# Altium PCB PCB_PokeBot.PcbDoc
Units mm, origin at the board's own origin, x right, y up, seen from the top; angles counter-clockwise.
Board outline 104 x 104 mm, 2 copper layers (Top Layer, Bottom Layer); 13 components, 10 nets, 63 pads, 0 vias.
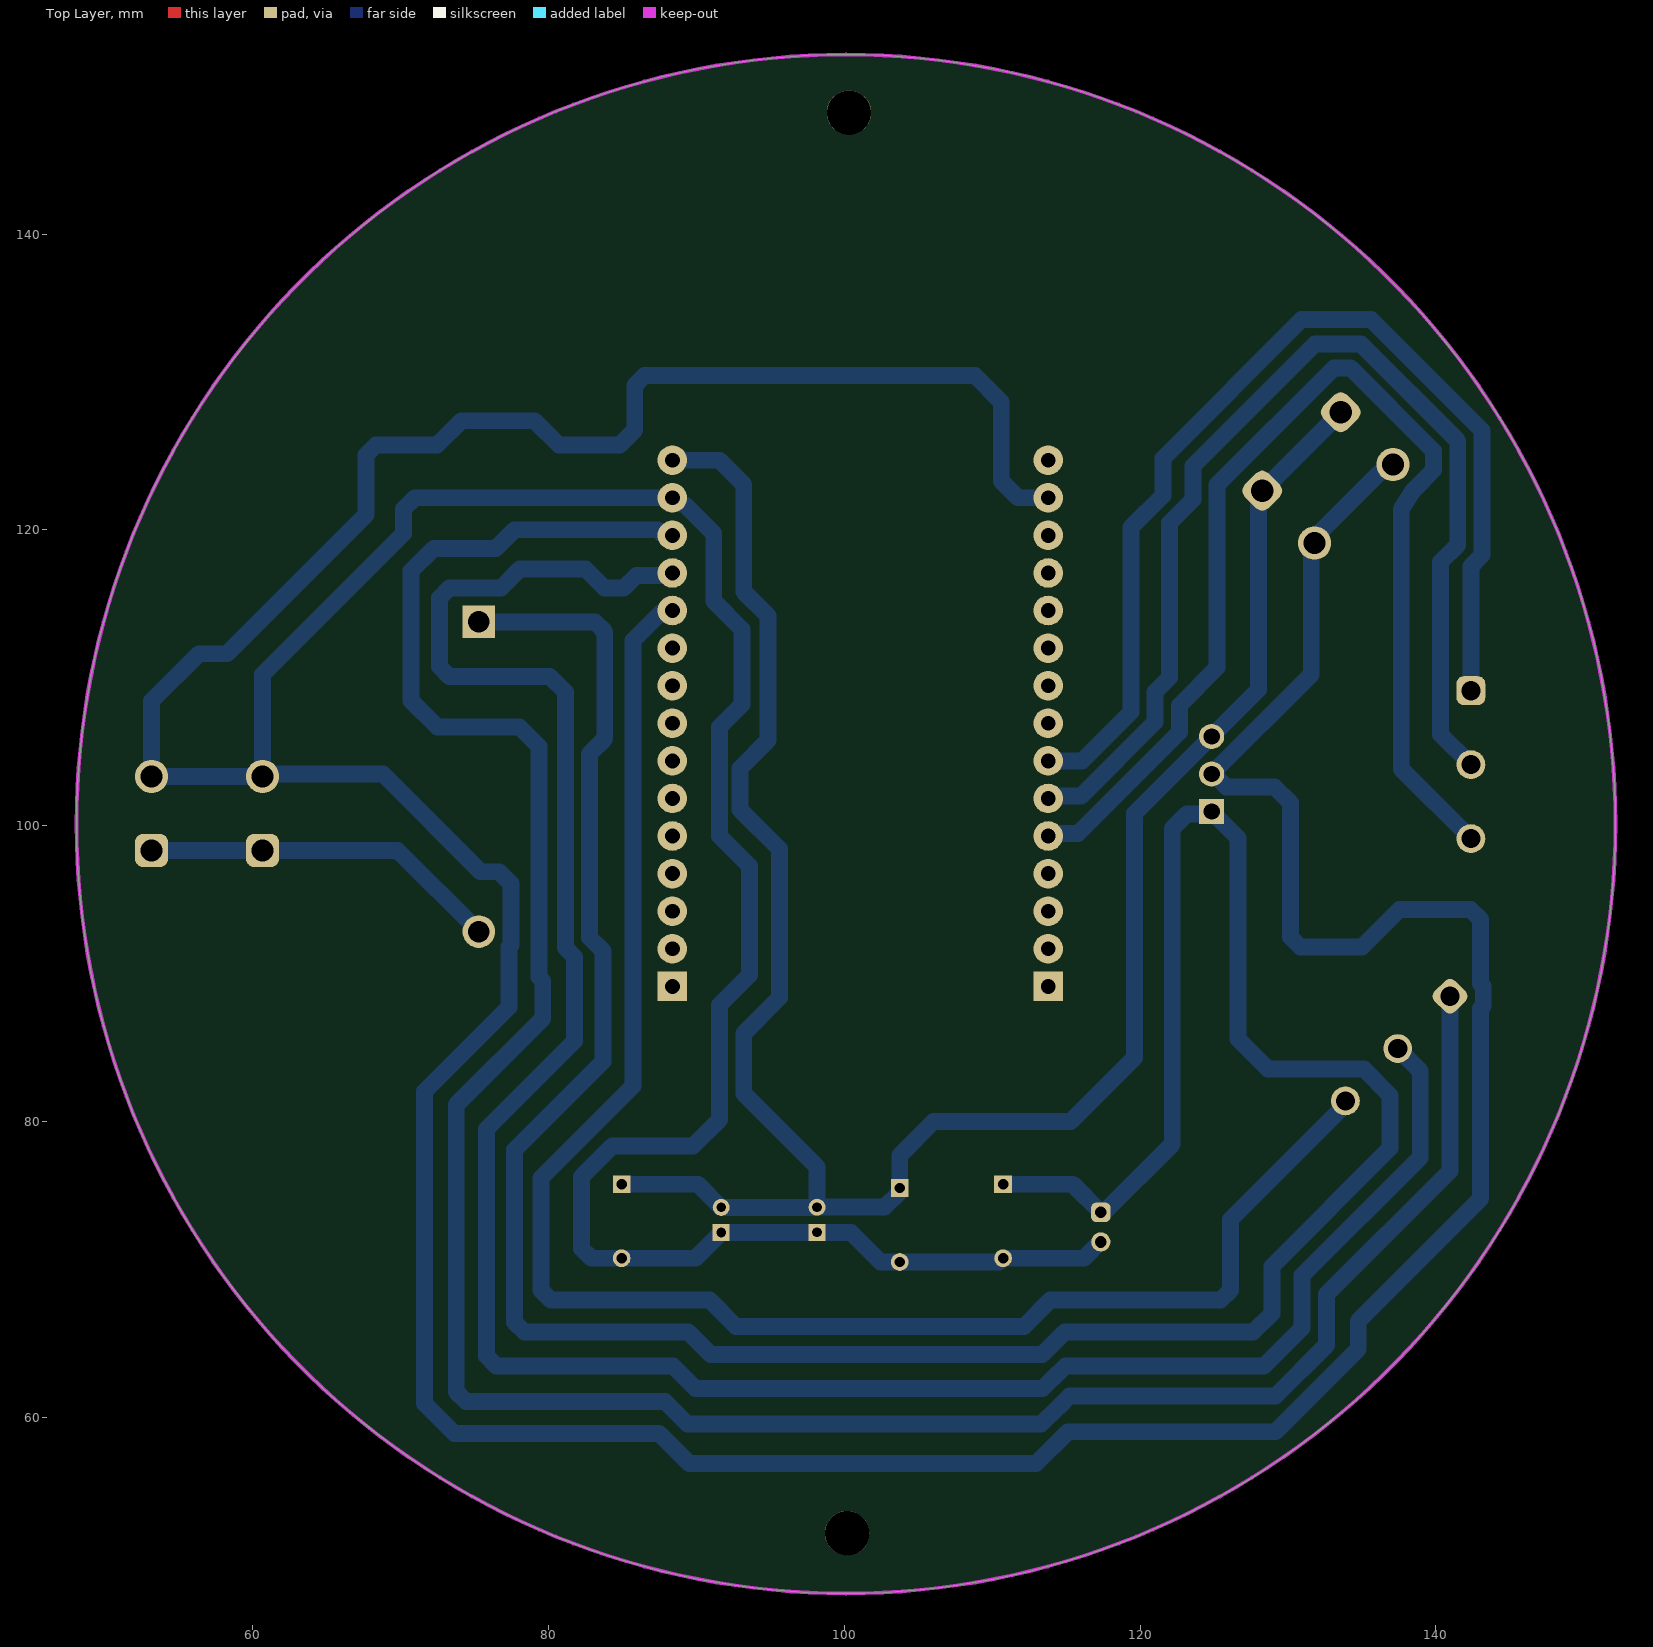
[diagram p0: Top Layer view]
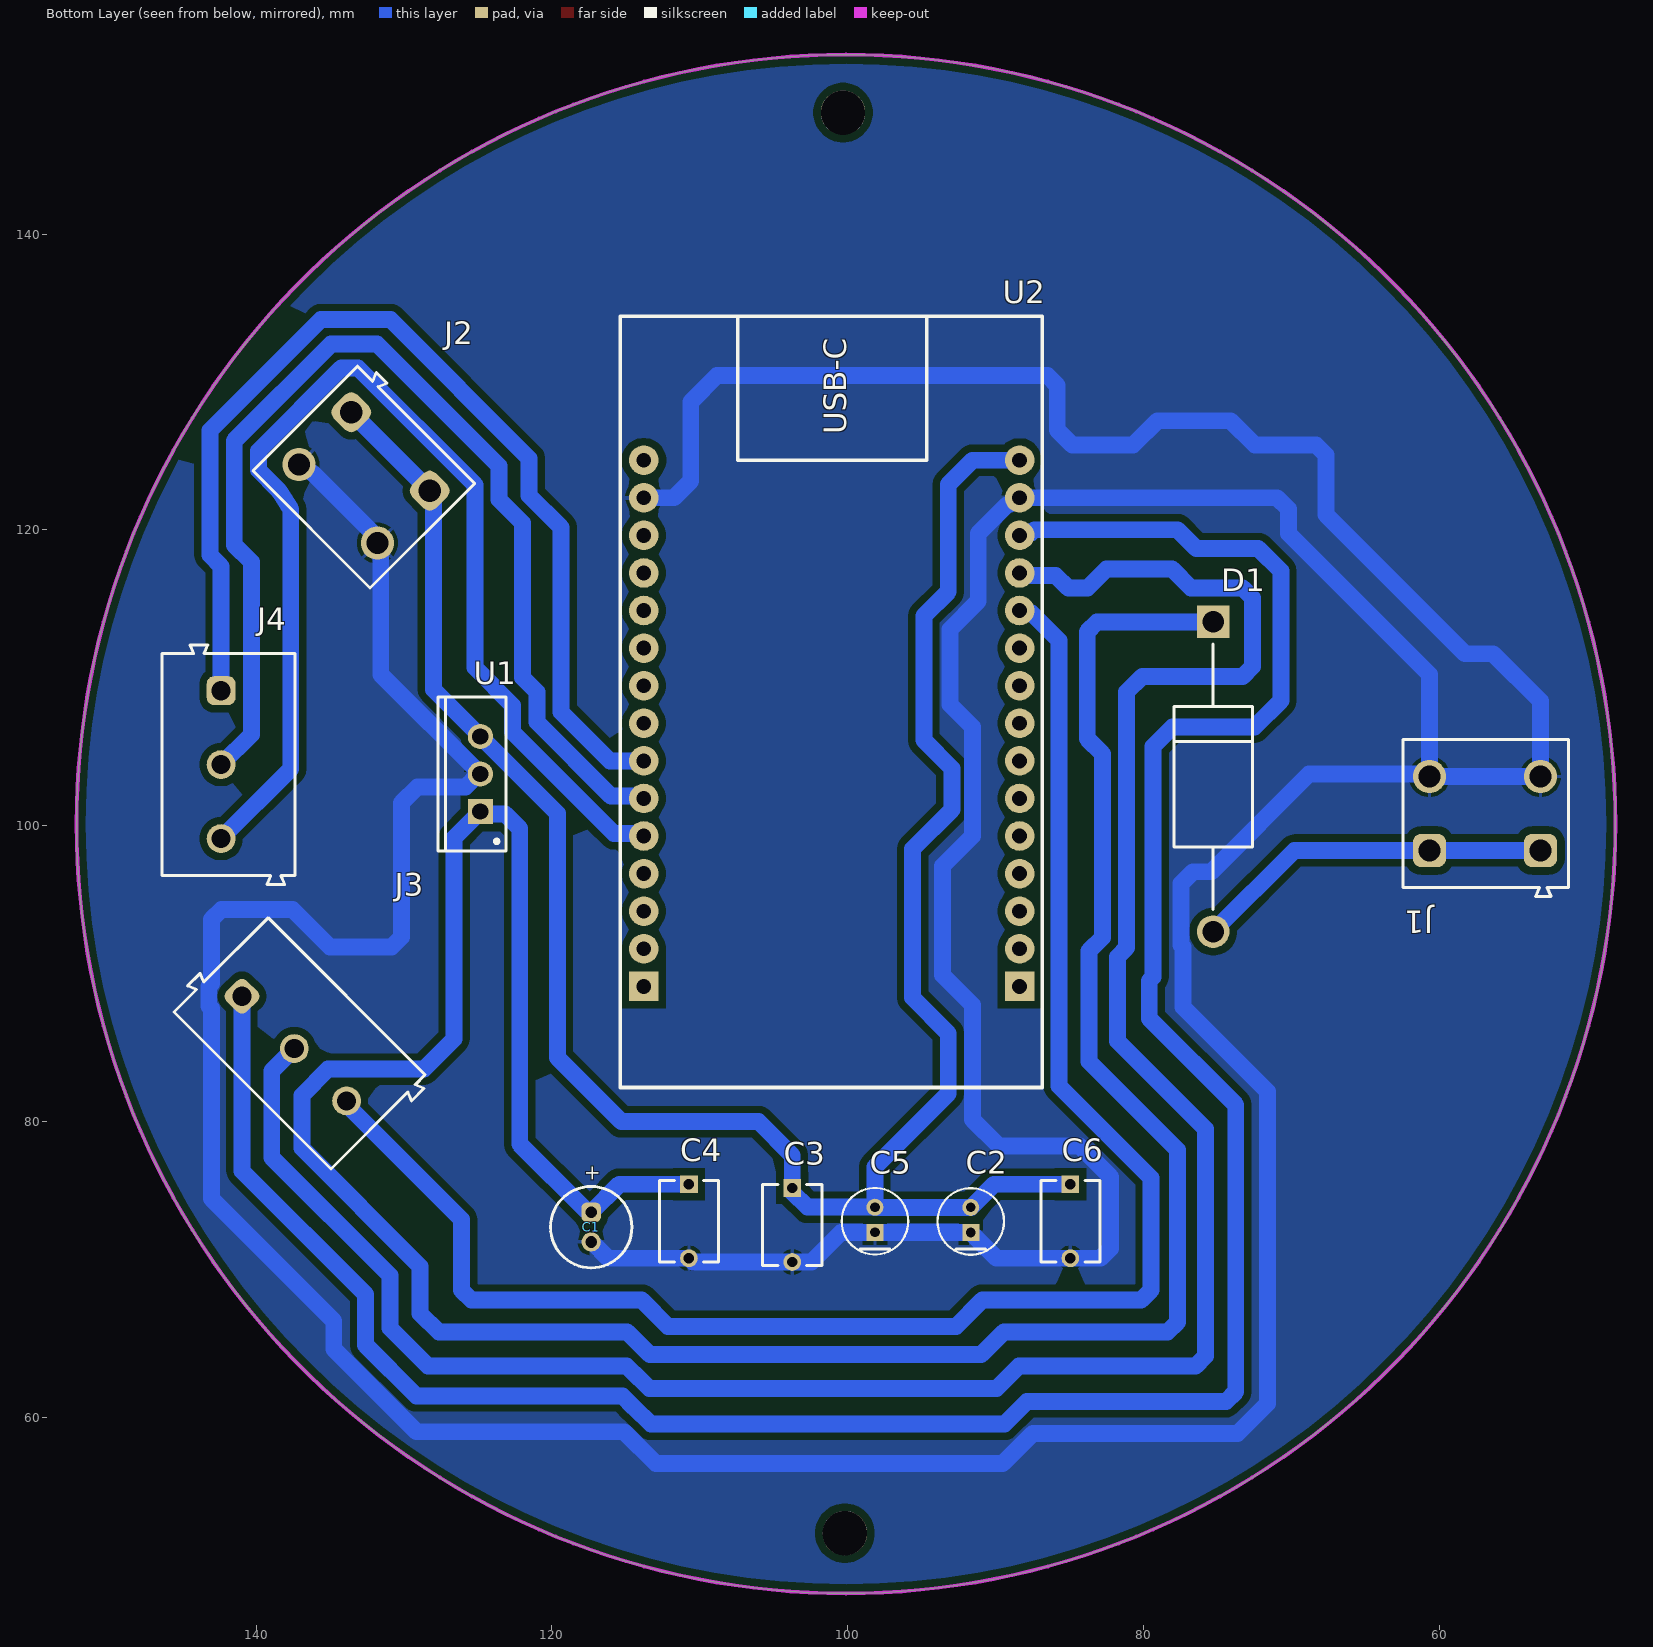
[diagram p1: Bottom Layer view, seen from below]
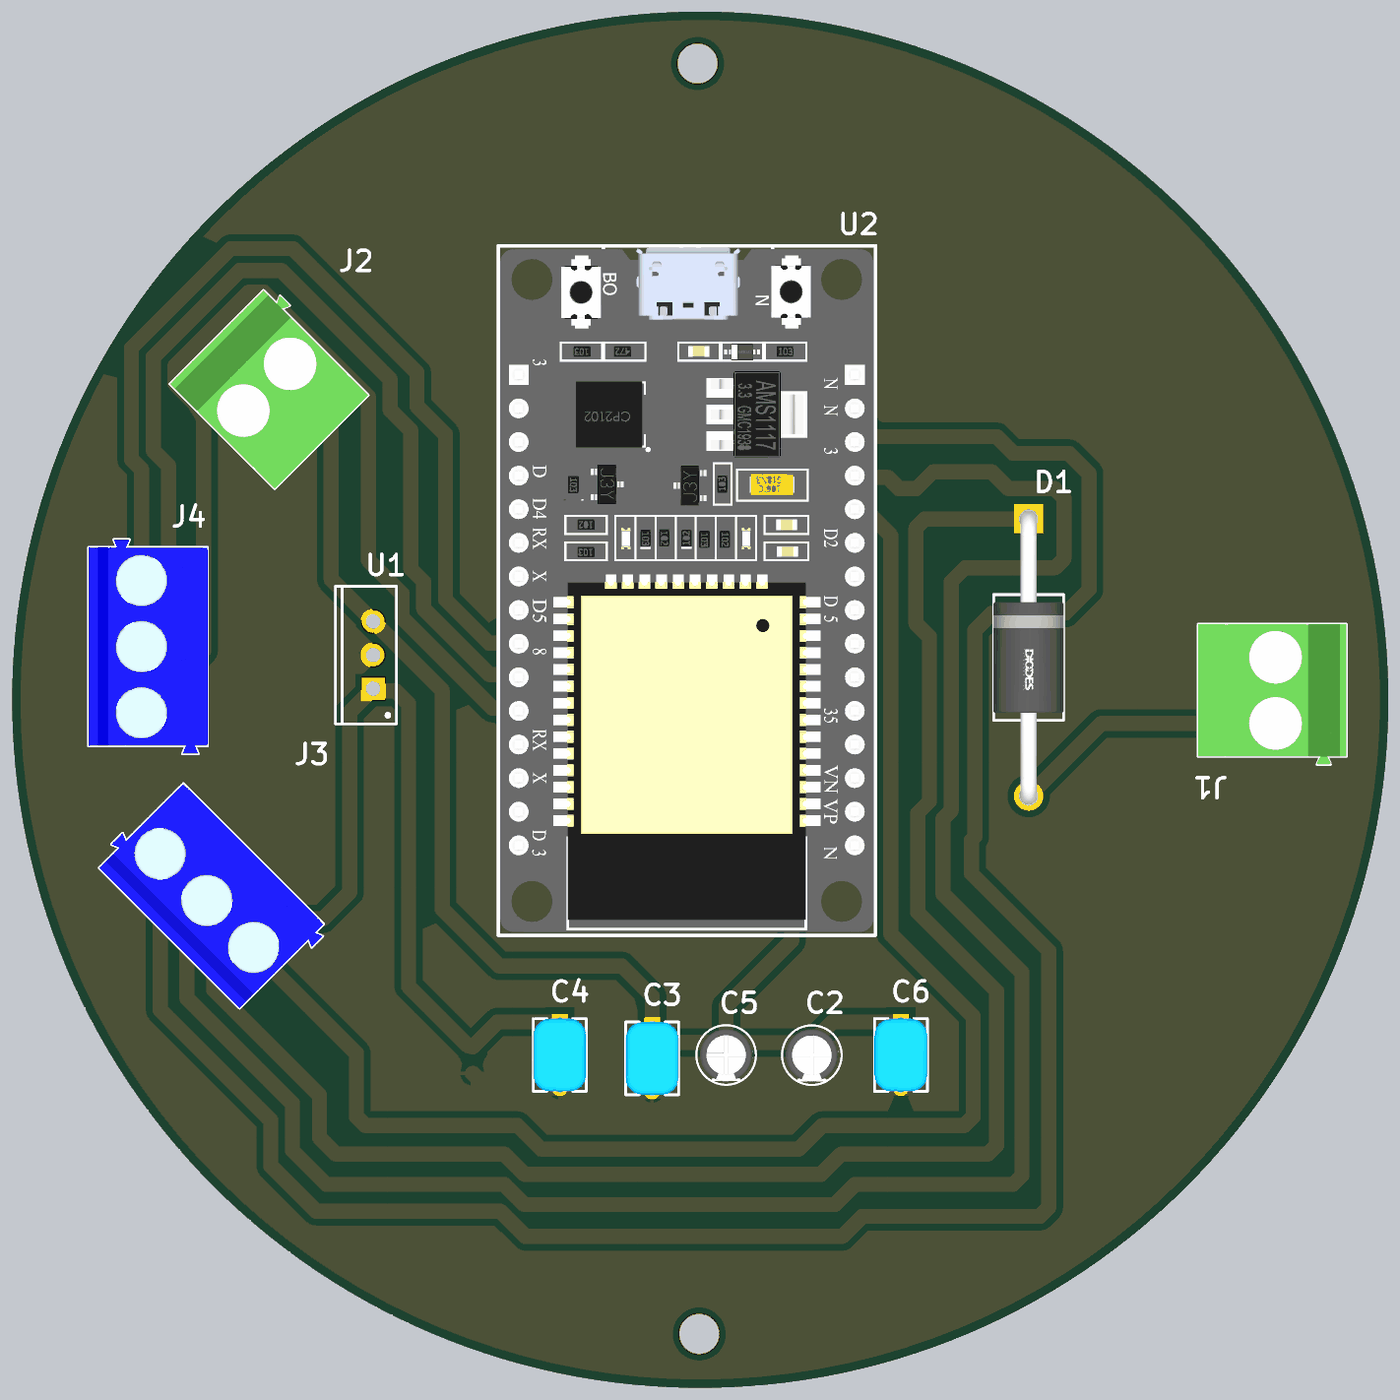
[diagram p2: 3D render of the assembled board from below, using the file's embedded part models]

## Layer stack, top to bottom
Top Solder: solder mask 0.0102, Solder Resist, Dk 3.5
Top Layer: signal copper 0.0356
Dielectric 1: dielectric 0.32, FR-4, Dk 4.8
Bottom Layer: signal copper 0.0356
Bottom Solder: solder mask 0.0102, Solder Resist, Dk 3.5

## Board outline
100.127,48.127 cw(c100.127,100.127) 48.127,100.127 cw(c100.127,100.127) 100.127,152.127 cw(c100.127,100.127) 152.127,100.127 cw(c100.127,100.127)

## Design rules (kind name [scope] priority, off if disabled: settings)
Clearance [All] p1: gap=0.5 ignorepadtopadclearanceinfootprint=FALSE
PolygonConnect [All] p1: connectstyle=Relief reliefconductorwidth=0.254 reliefentries=4 polygonreliefangle="90 Angle" airgapwidth=0.254
RoutingVias [All] p1: holewidth=0.711 width=1.27 viastyle="Through Hole" minholewidth=0.711 minwidth=1.27 maxholewidth=0.711 maxwidth=1.27
SolderMaskExpansion [All] p1: expansion=0.102 istentingtop=FALSE
SupplyNets "Schematic Supply Nets_2" [InNet('5V')] p1: voltage=0.000
SupplyNets "Schematic Supply Nets_1" [InNet('VMOT')] p2: voltage=0.000
SupplyNets "Schematic Supply Nets" [InNet('GND')] p3: voltage=0.000
Width [All] p1: maxlimit=1.27 minlimit=1.016 preferedwidth=1.143
30 further rules are at their usual default settings.

## Components (designator, comment, footprint, x,y, rotation, side; value= is the part's Value field where it differs from the comment)
C1 "860020672002" WCAP-ATG5_D5H11 1387.348,1342.882 r90 bottom
C2 "EEAGA1E100E" FP-RAD-TH-D_4_0_5-L_7_1-F-MFG 91.694,73.267 r90 bottom
C3 "RDED72W104K3K1H03B" FP-RDE3M1-MFG 103.759,73.025 r270 bottom
C4 "RDED72W104K3K1H03B" FP-RDE3M1-MFG 110.744,73.279 r270 bottom
C5 "EEAGA1E100E" FP-RAD-TH-D_4_0_5-L_7_1-F-MFG 98.171,73.279 r90 bottom
C6 "RDED72W104K3K1H03B" FP-RDE3M1-MFG 84.963,73.279 r270 bottom
D1 "1N5408G-T" FP-DO-201AD-MFG 75.311,103.322 r270 bottom value="110 pF"
J1 "691254710002" 691254710002 56.896,100.838 r90 bottom
J2 "691254710002" 691254710002 132.715,123.571 r315 bottom
J3 "691101710003" 691101710003 137.06,85.304 r225 bottom
J4 "691101710003" 691101710003 141.859,104.14 r270 bottom
U1 "L7805ABV" TO220 124.841,103.505 r90 bottom
U2 "ESP32" ESP32_DevKitCWROOM32 88.473,89.124 r90 bottom

## Footprints (in the part's own frame and the unit in brackets; to place one, negate y for a bottom-side part, rotate by r counter-clockwise, add the part's x,y. Pads: shape width x height; smd on the part's side, far side on the other; paste and mask are expansions set on the pad)
691101710003 [mm] "5,00mm - modular - blue - Horizontal entry with pressure clamp - 12,6mm height - 03p"
  rrect50% 1.95x1.95 hole 1.3: 1(-5,-0.5)
  round 1.95 hole 1.3: 2(0,-0.5) 3(5,-0.5)
  silkscreen extent -8.1,-4.5 8.1,4.5, body extent -8.1,-4.5 8.1,4.5, height 12.65
691254710002 [mm] "Serie 2547-5.00mm Horizontal Cable Entry with Rising Cage Clamp, 2 pins"
  rrect50% 2.25x2.25 hole 1.5: 1(-2.5,-3.7) 1(-2.5,3.8)
  round 2.25 hole 1.5: 2(2.5,-3.7) 2(2.5,3.8)
  silkscreen extent -5.6,-5.6 5,5.6, body extent -5.6,-5.6 5,5.6, height 18.05
ESP32_DevKitCWROOM32 [mm] "Multiprotocol Modules SMD Module ESP32-WROOM-32E, ESP32-D0WD-V3, 16 MB SPI flash, PCB antenna"
  rect 2x2 hole 1: 1(0.03,-0.081) 30(0.03,25.319)
  round 2 hole 1: 2(2.57,-0.081) 3(5.11,-0.081) 4(7.65,-0.081) 5(10.19,-0.081) 6(12.73,-0.081) 7(15.27,-0.081) 8(17.81,-0.081) 9(20.35,-0.081) 10(22.89,-0.081) 11(25.43,-0.081) 12(27.97,-0.081) 13(30.51,-0.081) 14(33.05,-0.081) 15(35.59,-0.081) 16(35.59,25.319) 17(33.05,25.319) 18(30.51,25.319) 19(27.97,25.319) 20(25.43,25.319) 21(22.89,25.319) 22(20.35,25.319) 23(17.81,25.319) 24(15.27,25.319) 25(12.73,25.319) 26(10.19,25.319) 27(7.65,25.319) 28(5.11,25.319) 29(2.57,25.319)
  silkscreen extent -6.8,-1.61 45.32,26.92, body extent -6.54,-1.43 45.16,26.77, height 7.79
FP-DO-201AD-MFG [mm]
  rect 2.2x2.2 hole 1.45 paste-2539.97 mask+0: 1(-10.47,0)
  round 2.2 hole 1.45 paste-2539.97 mask+0: 2(10.47,0)
  silkscreen extent -8.97,-2.65 8.97,2.65, body extent -11.09,-2.65 11.09,2.65, height 5.3
FP-RAD-TH-D_4_0_5-L_7_1-F-MFG [mm]
  rect 1.15x1.15 hole 0.65 paste-2539.97 mask+0: 1(-0.75,0)
  round 1.15 hole 0.65 paste-2539.97 mask+0: 2(0.95,0)
  silkscreen extent -2.25,-2.25 2.25,2.25, body extent -2,-2.01 1.99,1.99, height 8
FP-RDE3M1-MFG [mm]
  rect 1.2x1.2 hole 0.7 paste-2539.97 mask+0: 1(-2.5,0)
  round 1.2 hole 0.7 paste-2539.97 mask+0: 2(2.5,0)
  silkscreen extent -2.75,-2 2.75,2, body extent -2.75,-2 2.75,2, height 7.5
TO220 [mm] "TO, Thru-Hole, Vertical, Heatsink Mounted; 3 In-Line Leads; Pitch 2.54 mm"
  rect 1.7x1.7 hole 1.1: 1(-2.54,0)
  round 1.7 hole 1.1: 2(0,0) 3(2.54,0)
  silkscreen extent -5.2,-1.75 5.2,2.85, body extent -5.25,-1.8 5.25,2.9, height 19.7
WCAP-ATG5_D5H11 [mm] "Aluminum Electrolytic Capacitors, 5x11mm"
  rrect50% 1.3x1.3 hole 0.8: 1(-1269,-1270)
  round 1.3 hole 0.8: 2(-1271,-1270)
  silkscreen extent -1272.75,-1272.75 -1267.25,-1267.25, body extent -1272.49,-1272.5 -1267.5,-1267.5, height 11.31

## Part data
C1: library part CMP-03913-53914225-2, "WCAP-ATG5 Aluminum Electrolytic Capacitors", Capacitance=220nF, Case/Package=Radial, Leakage Current=3µA, Max Operating Temperature=105°C, Min Operating Temperature=-40°C, Ripple Current=2.9mA, Tolerance=20%, Voltage Rating=50V, Diameter=5mm, Height=11mm, Height - Seated (Max)=12.4968mm, Lead Pitch=2.0066mm, Length=11mm, Life (Hours)=2000hours, Mount="Through Hole", Packaging="Tape & Box (TB)", Pitch=2mm, Polarity=Polar, REACH SVHC=Unknown, RoHS=Compliant, Voltage Rating (DC)=50V
C2 C5: library part CMP-05427-000151-1, "Aluminum Electrolytic Capacitors (Radial Lead Type) 10uF ±20% 25V", Capacitance=10uF
C3 C4 C6: library part CMP-06035-016817-1, "Ceramic Capacitor 100nF ±10% 450V X7T Radial", Capacitance=100nF, Case/Package=Radial, Dielectric=X7T, Max Operating Temperature=125°C, Min Operating Temperature=-55°C, Tolerance=10%, Voltage Rating=450V, Lead Pitch=5mm, REACH SVHC="No SVHC", Voltage Rating (DC)=450V
D1: library part CMP-12790-000042-1, "DIODE SCHOTTKY 40V 1A DO41", Capacitance="110 pF", Forward Current=1A, Manufacturer="Diodes Inc.", Manufacturer Part Number=1N5819-T, Max Junction Temp=+125°C, Max Repetitive Reverse Voltage=40V, Max Surge Forward Current=25A, Package="DO-41 (Plastic)", Peak Reverse Current=1mA, Temperature="-65°C to +125°C", Temperature Range Low=-65°C, Automotive=No, Category=Diode, ComponentLink2Description=Datasheet, ComponentLink2URL=https://www.diodes.com/assets/Datasheets/ds23001.pdf, Device Class L1="Discrete Semiconductors", Device Class L2=Diodes, Device Class L3="Schottky Diodes", Digikey Description="DIODE SCHOTTKY 40V 1A DO41", Footprint Url=https://www.diodes.com/assets/Package-Files/DO-41-Plastic.pdf, Height=2.72mm, Ipc Land Pattern Name=DIOPA1091W105L521D272, Lead Free=Yes, Mouser Description="Schottky Diodes & Rectifiers Vr/40V Io/1A T/R", Octopart=https://octopart.com/1n5819-t-diodes+inc.-55389586, Reverse Voltage=40V, RoHS=TRUE, Temperature Range High=+125°C
J1 J2: library part CMP-1502-02591-3, "Terminal Block, 5MM Pitch, Horizontal, Rising Cage Clamp, 16-30 AWG, 2 Pin"
J3 J4: library part CMP-1502-03257-3, "101 Series 5MM Pitch Straight, Pcb Terminal Block, Through Hole, 3 Way", Color=Blue, Current=16A, Max Operating Temperature=105°C, Min Operating Temperature=-40°C, Voltage=250V, Contact Material=Brass, Contact Plating=Tin, Current Rating=16A, Height=16.4mm, Housing Material=Nylon, Lead Pitch=5mm, Length=9mm, Mount="Through Hole", Number of Contacts=3, Number of Levels=1, Number of Pins=3, Number of Positions Per Level=3, Packaging=Box, Pitch=5.0038mm, Plating=Steel, RoHS=Compliant, Stripping Length=-7mm, Termination=Screw, Voltage Rating=250V, Width=16.2mm, Wire Gauge (Max)=26AWG, Wire Gauge (Min)=14AWG, Wire/Cable Gauge=26AWG
U1: library part CMP-0244-00485-1, "Positive Voltage Regulator, 5V, 3-Pin TO-220", ComponentLink1Description="Manufacturer URL", ComponentLink1URL=http://www.st.com, ComponentLink2Description=Datasheet, ComponentLink2URL=http://www.st.com/internet/com/TECHNICAL_RESOURCES/TECHNICAL_LITERATURE/DATASHEET/CD00000444.pdf, ComponentLink3Description="Package Specification", ComponentLink3URL=http://www.st.com/internet/com/TECHNICAL_RESOURCES/TECHNICAL_LITERATURE/PACKAGE_INFORMATION/CD00004649.pdf, DatasheetVersion=16/11/2011, PackageDescription="TO, Thru-Hole, Vertical, Heatsink Mounted; 3 In-Line Leads; Pitch 2.54 mm", PackageReference=TO220, PackageVersion=ver3.0
U2: library part ESP32-WROOM32, "Multiprotocol Modules SMD Module ESP32-WROOM-32E, ESP32-D0WD-V3, 16 MB SPI flash, PCB antenna", Manufacturer="Espressif Systems", Manufacturer Part Number=ESP32-WROOM-32E-N16, Max Operating Temperature=85°C, Max Supply Voltage=3.6V, Min Operating Temperature=-40°C, Min Supply Voltage=3V, Operating Supply Voltage=3.3V, Supplier Part Number=5407-ESP32-WROOM-32E-N16CT-ND, Category="RF Transceiver Modules and Modems", ComponentLink1Description=https://datasheet.octopart.com:443/ESP32-WROOM-32E-N16-Espressif-Systems-datasheet-182247776.pdf?src-supplier=IHS, ComponentLink1URL=https://datasheet.octopart.com:443/ESP32-WROOM-32E-N16-Espressif-Systems-datasheet-182247776.pdf?src-supplier=IHS, ComponentLink2Description=https://datasheet.octopart.com:443/ESP32-WROOM-32E-N16-Espressif-Systems-datasheet-192340067.pdf?src-supplier=HQonline, ComponentLink2URL=https://datasheet.octopart.com:443/ESP32-WROOM-32E-N16-Espressif-Systems-datasheet-192340067.pdf?src-supplier=HQonline, ComponentLink3Description=https://datasheet.octopart.com:443/ESP32-WROOM-32E-N16-Espressif-Systems-datasheet-188867343.pdf?src-supplier=TME, ComponentLink3URL=https://datasheet.octopart.com:443/ESP32-WROOM-32E-N16-Espressif-Systems-datasheet-188867343.pdf?src-supplier=TME, ComponentLink4Description=https://datasheet.octopart.com:443/ESP32-WROOM-32E-N16-Espressif-Systems-datasheet-165560559.pdf?src-supplier=TME, ComponentLink4URL=https://datasheet.octopart.com:443/ESP32-WROOM-32E-N16-Espressif-Systems-datasheet-165560559.pdf?src-supplier=TME, ComponentLink5Description=https://datasheet.octopart.com:443/ESP32-WROOM-32E-N16-Espressif-Systems-datasheet-151884363.pdf?src-supplier=Future+Electronics, ComponentLink5URL=https://datasheet.octopart.com:443/ESP32-WROOM-32E-N16-Espressif-Systems-datasheet-151884363.pdf?src-supplier=Future+Electronics, Harmonized Tariff Schedule (HTS) Code=8542.31.00.30, Height - Seated (Max)=3.25mm, Length=25.5mm, Number of Terminals=38, Pricing="1=5.71, 10=4.941, 25=4.6748, 100=4.3087, 250=4.0894 (USD)", REACH SVHC=Yes, RoHS=Compliant, Stock=9659, Supplier=DigiKey, Terminal Pitch=1.27mm, Width=18mm

## Free pads (board coordinates)
  round 3 hole 3: 2(100.203,52.197) 3(100.33,148.209)

## Nets (pads, with @x,y where several pads share a name; then routed paths per layer and width w, separated by ;. In a path a pad name is that pad's centre, name@x,y a point inside that pad or via, vN(x,y) a via of type N, cw(c..) or ccw(c..) an arc to the next point about the centre after c; other vN are vias at no path point)
5V: C2.2 C3.1 C5.2 C6.1 J2.1 U1.3 U2.15 | length 149.4
  Bottom Layer w1.143: C6.1 90.13,75.779 91.692,74.217 C2.2 98.157,74.217 98.169,74.229 102.741,74.229 103.73,75.219 103.73,75.496 C3.1 103.759,77.724 106.045,80.01 115.316,80.01 119.634,84.328 119.634,100.838 U1.3 128.016,109.22 J2.1@128.016,121.793 ; U2.15 91.567,124.714 93.218,123.063 93.218,115.824 94.869,114.173 94.869,105.791 92.964,103.886 92.964,101.092 95.631,98.425 95.631,88.392 93.218,85.979 93.218,81.915 98.171,76.962 C5.2 ; J2.1@128.26,122.652 J2.1@133.564,127.955
ENA: J3.3 U2.11 | length 114.6
  Bottom Layer w1.143: U2.11 88.228,114.39 87.593,114.39 85.725,112.522 85.725,82.423 79.502,76.2 79.502,68.615 80.172,67.945 90.918,67.945 92.696,66.167 112.155,66.167 113.933,67.945 125.441,67.945 126.111,68.615 126.111,73.406 133.475,80.77 133.475,80.793 133.878,81.196 J3.3
ENB: J4.3 U2.26 | length 78.7
  Bottom Layer w1.143: U2.26 113.956,99.478 115.809,99.478 122.666,106.335 122.666,108.146 125.214,110.694 125.214,123.055 133.096,130.937 134.239,130.937 139.827,125.349 139.827,124.041 138.53,122.744 138.369,122.541 137.653,121.394 137.653,103.847 J4.3
GND: C1.2 C2.1 C3.2 C4.2 C5.1 C6.2 J1.2 J2.2 U1.2 U2.14 U2.17 | length 449
  Bottom Layer w1.143: U2.17 111.76,122.174 110.617,123.317 110.617,128.651 108.839,130.429 86.522,130.429 85.852,129.759 85.852,126.746 84.836,125.73 80.717,125.73 79.066,127.381 74.13,127.381 72.479,125.73 68.361,125.73 67.691,125.06 67.691,121.031 58.293,111.633 56.388,111.633 53.196,108.441 53.196,103.338 J1.2@60.696,103.338 ; C1.2 117.306,71.882 116.203,70.779 C4.2 110.729,70.779 110.475,70.525 C3.2 103.748,70.536 102.454,70.536 100.46,72.529 C5.1 98.159,72.517 C2.1 89.956,70.779 C6.2 82.926,70.779 82.256,71.449 82.256,76.287 84.328,78.359 89.789,78.359 91.567,80.137 91.567,87.884 93.599,89.916 93.599,97.282 91.567,99.314 91.567,106.68 93.091,108.204 93.091,113.284 91.186,115.189 91.186,119.77 89.25,121.705 89.092,121.705 88.624,122.174 70.993,122.174 70.231,121.412 70.231,119.761 60.696,110.226 J1.2@60.696,103.338 ; J2.2@137.296,124.916 136.246,123.866 136.185,123.866 131.572,119.253 131.584,119.241 131.584,118.122 131.572,118.11 131.572,110.236 U1.2 124.992,103.505 125.856,102.641 129.1,102.641 130.175,101.565 130.175,92.491 130.845,91.821 135.001,91.821 137.541,94.361 142.332,94.361 143.002,93.691 143.002,89.327 143.198,89.132 143.198,87.84 143.002,87.644 143.002,74.803 134.747,66.548 134.747,64.643 129.159,59.055 115.133,59.055 112.974,56.896 89.535,56.896 87.503,58.928 73.66,58.928 71.628,60.96 71.628,82.042 77.343,87.757 77.343,91.813 77.482,91.953 77.482,96.092 76.673,96.901 75.438,96.901 68.834,103.505 60.863,103.505 J1.2@60.696,103.338
INA1: J3.1 U2.13 | length 172.8
  Bottom Layer w1.143: U2.13 88.228,119.798 87.622,119.798 87.405,120.015 77.724,120.015 76.454,118.745 72.263,118.745 70.739,117.221 70.739,108.458 72.517,106.68 78.07,106.68 79.375,105.375 79.375,89.773 79.629,89.519 79.629,86.995 73.787,81.153 73.787,61.757 74.457,61.087 87.884,61.087 89.408,59.563 113.317,59.563 114.452,60.698 114.471,60.698 115.241,61.468 129.159,61.468 132.588,64.897 132.588,68.326 140.95,76.688 J3.1
INA2: J3.2 U2.12 | length 159.5
  Bottom Layer w1.143: U2.12 88.228,116.93 85.958,116.93 85.106,116.078 83.799,116.078 82.529,117.348 78.079,117.348 76.809,116.078 73.314,116.078 72.644,115.408 72.644,110.779 73.314,110.109 80.102,110.109 81.161,109.05 81.161,91.767 81.788,91.14 81.788,85.471 75.819,79.502 75.819,64.17 76.489,63.5 88.43,63.5 89.954,61.976 113.407,61.976 114.05,62.619 114.068,62.619 114.949,63.5 128.383,63.5 130.945,66.062 130.945,69.604 138.938,77.597 138.938,83.426 J3.2
INB1: J4.1 U2.24 | length 71.4
  Bottom Layer w1.143: U2.24 116.078,104.394 119.38,107.696 119.38,120.18 121.539,122.339 121.539,124.841 130.921,134.223 135.6,134.223 143.113,126.71 143.113,118.302 142.359,117.548 J4.1
INB2: J4.2 U2.25 | length 75
  Bottom Layer w1.143: U2.25 113.956,102.018 116.026,102.018 121.023,107.015 121.023,109.043 121.997,110.017 121.997,120.473 123.571,122.047 123.571,124.333 131.818,132.58 134.92,132.58 141.47,126.03 141.47,118.983 140.313,117.825 140.313,106.187 J4.2
NetC1_1: C1.1 C4.1 D1.1 U1.1 | length 196.6
  Bottom Layer w1.143: D1.1 83.15,113.792 83.82,113.122 83.82,105.892 82.804,104.876 82.804,92.447 83.693,91.558 83.693,84.074 77.724,78.105 77.724,66.456 78.394,65.786 89.466,65.786 90.99,64.262 113.388,64.262 114.912,65.786 127.635,65.786 128.905,67.056 128.905,70.231 136.906,78.232 136.906,81.788 135.128,83.566 128.651,83.566 126.619,85.598 126.619,99.187 U1.1 124.684,100.808 123.16,100.808 122.174,99.822 122.174,78.486 117.649,73.961 117.427,73.961 C1.1 115.451,75.779 C4.1
VMOT: D1.2 J1.1 | length 24.4
  Bottom Layer w1.143: J1.1@53.196,98.338 60.696,98.338 69.825,98.338 D1.2
pads on no net: U2.1 U2.2 U2.3 U2.4 U2.5 U2.6 U2.7 U2.8 U2.9 U2.10 U2.16 U2.18 U2.19 U2.20 U2.21 U2.22 U2.23 U2.27 U2.28 U2.29 U2.30

## Polygon pours and split planes (outlines as drawn)
GND on Bottom Layer "GND_L02_P000" (solid, remove dead copper, pour order 0): 43.18,156.845 41.402,156.845 166.624,156.845 166.624,46.736 165.735,45.847 164.846,46.736 36.322,46.736 36.322,154.94 38.354,156.972 41.021,156.845

## Keep-outs
Keep-Out Layer:
  circle w0.254: c100.127,100.127 r52

## Text inside footprints (layer, text, board x,y; h text height)
C1: Bottom Overlay "+" at 116.848,75.932 h1 r270
U2: Bottom Overlay "USB-C" at 100.127,126.467 h1.52 r270